# EAGLE board ai_breakout_TXB0108_panel (EAGLE 7.1.0)
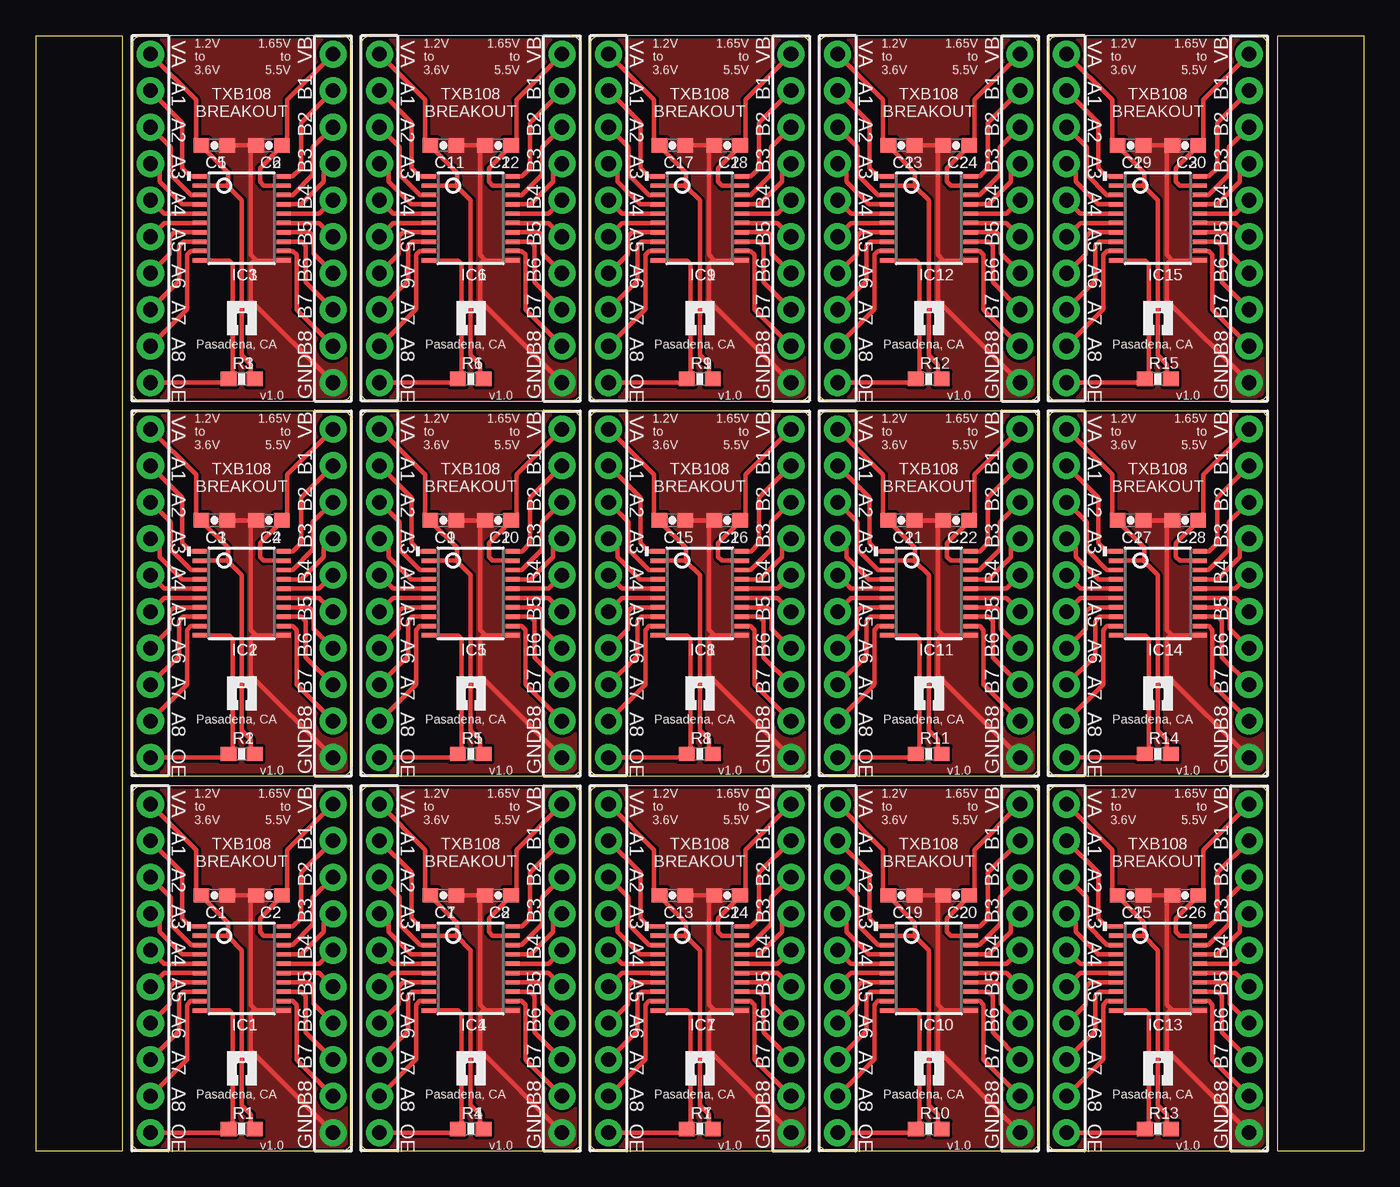
[diagram p0: board, top side]
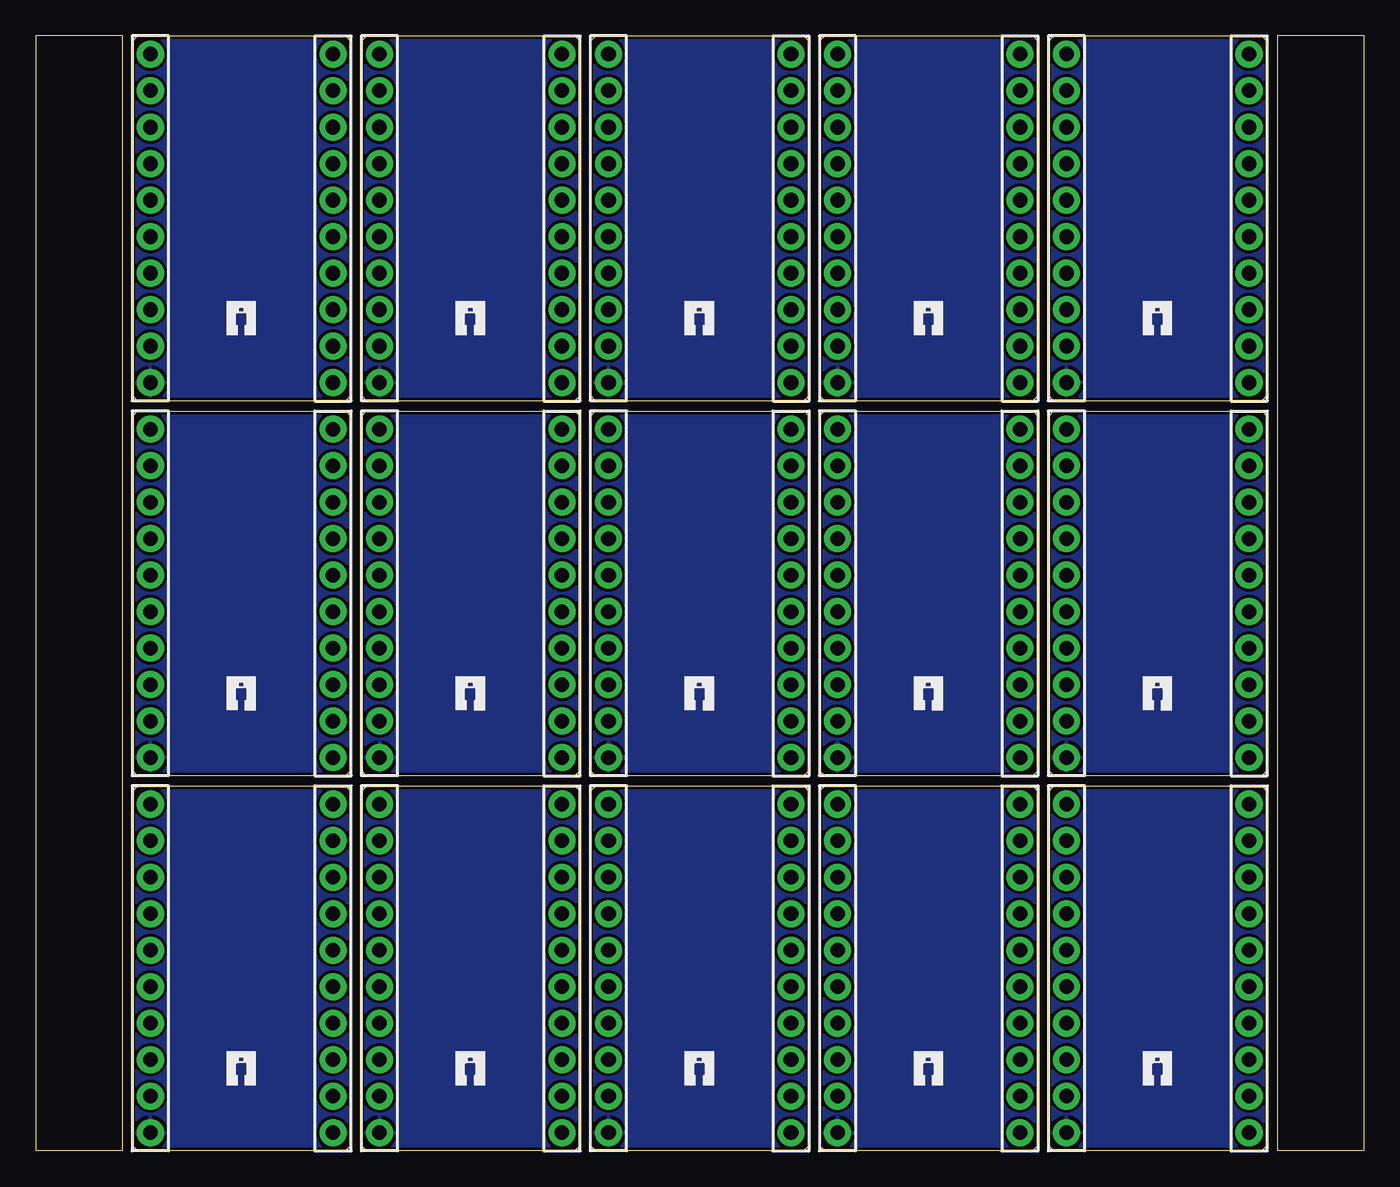
[diagram p1: board, bottom side, seen from below]

Size 92.4 x 77.6 mm. Coordinates in mm from the lower left corner, seen from the top.
Outline: 7.33,0 21.3,0 arc90 21.94,0.64 21.94,24.77 arc90 21.3,25.4 7.33,25.4 arc90 6.7,24.77 6.7,0.64 arc90 7.33,0
Outline: 7.33,26.1 21.3,26.1 arc90 21.94,26.73 21.94,50.87 arc90 21.3,51.5 7.33,51.5 arc90 6.7,50.87 6.7,26.73 arc90 7.33,26.1
Outline: 7.33,52.2 21.3,52.2 arc90 21.94,52.84 21.94,76.97 arc90 21.3,77.6 7.33,77.6 arc90 6.7,76.97 6.7,52.84 arc90 7.33,52.2
Outline: 23.27,0 37.24,0 arc90 37.88,0.64 37.88,24.77 arc90 37.24,25.4 23.27,25.4 arc90 22.64,24.77 22.64,0.64 arc90 23.27,0
Outline: 23.27,26.1 37.24,26.1 arc90 37.88,26.73 37.88,50.87 arc90 37.24,51.5 23.27,51.5 arc90 22.64,50.87 22.64,26.73 arc90 23.27,26.1
Outline: 23.27,52.2 37.24,52.2 arc90 37.88,52.84 37.88,76.97 arc90 37.24,77.6 23.27,77.6 arc90 22.64,76.97 22.64,52.84 arc90 23.27,52.2
Outline: 39.22,0 53.19,0 arc90 53.82,0.64 53.82,24.77 arc90 53.19,25.4 39.22,25.4 arc90 38.58,24.77 38.58,0.64 arc90 39.22,0
Outline: 39.22,26.1 53.19,26.1 arc90 53.82,26.73 53.82,50.87 arc90 53.19,51.5 39.22,51.5 arc90 38.58,50.87 38.58,26.73 arc90 39.22,26.1
Outline: 39.22,52.2 53.19,52.2 arc90 53.82,52.84 53.82,76.97 arc90 53.19,77.6 39.22,77.6 arc90 38.58,76.97 38.58,52.84 arc90 39.22,52.2
Outline: 55.16,0 69.12,0 arc90 69.76,0.64 69.76,24.77 arc90 69.12,25.4 55.16,25.4 arc90 54.52,24.77 54.52,0.64 arc90 55.16,0
Outline: 55.16,26.1 69.12,26.1 arc90 69.76,26.73 69.76,50.87 arc90 69.12,51.5 55.16,51.5 arc90 54.52,50.87 54.52,26.73 arc90 55.16,26.1
Outline: 55.16,52.2 69.12,52.2 arc90 69.76,52.84 69.76,76.97 arc90 69.12,77.6 55.16,77.6 arc90 54.52,76.97 54.52,52.84 arc90 55.16,52.2
Outline: 71.09,0 85.06,0 arc90 85.7,0.64 85.7,24.77 arc90 85.06,25.4 71.09,25.4 arc90 70.46,24.77 70.46,0.64 arc90 71.09,0
Outline: 71.09,26.1 85.06,26.1 arc90 85.7,26.73 85.7,50.87 arc90 85.06,51.5 71.09,51.5 arc90 70.46,50.87 70.46,26.73 arc90 71.09,26.1
Outline: 71.09,52.2 85.06,52.2 arc90 85.7,52.84 85.7,76.97 arc90 85.06,77.6 71.09,77.6 arc90 70.46,76.97 70.46,52.84 arc90 71.09,52.2
Outline: 0,77.6 0,0 6,0 6,77.6 0,77.6
Outline: 86.4,77.6 86.4,0 92.4,0 92.4,77.6 86.4,77.6
Copper layers (1*16): Top 0.035mm / dielectric 1.5mm / Bottom 0.035mm
Design rules "ai_2layer": minimum track width 7mil, minimum drill 15mil, track to track 8mil, track to pad 8mil, pad to pad 8mil, via to via 8mil, smd to smd 8mil, copper to edge 8mil, drill to drill 8mil, minimum pad ring 12mil, minimum via ring 10mil, stop-mask expansion 4mil, vias tented up to drill 20mil, thermal gap 10mil

## Footprints (pad centres in the part's own frame; a part is rotated, then mirrored left to right if it is on the bottom)
CAP-0603 = smd 1.1 x 1: 1 -0.9,0; 2 0.9,0
TSSOP20 = smd 0.305 x 0.991: 1 -2.925,-2.918; 2 -2.275,-2.918; 3 -1.625,-2.918; 4 -0.975,-2.918; 5 -0.325,-2.918; 6 0.325,-2.918; 7 0.975,-2.918; 8 1.625,-2.918; 9 2.275,-2.918; 10 2.925,-2.918; 11 2.925,2.918; 12 2.275,2.918; 13 1.625,2.918; 14 0.975,2.918; 15 0.325,2.918; 16 -0.325,2.918; 17 -0.975,2.918; 18 -1.625,2.918; 19 -2.275,2.918; 20 -2.925,2.918
1X10 = drill 1.016 pad 1.88: 1 -11.43,0; 2 -8.89,0; 3 -6.35,0; 4 -3.81,0; 5 -1.27,0; 6 1.27,0; 7 3.81,0; 8 6.35,0; 9 8.89,0; 10 11.43,0
1X10-NOFIRST = drill 1.016 pad 1.88: 1 -11.43,0; 2 -8.89,0; 3 -6.35,0; 4 -3.81,0; 5 -1.27,0; 6 1.27,0; 7 3.81,0; 8 6.35,0; 9 8.89,0; 10 11.43,0
RES-0603 = smd 1.1 x 1: 1 -0.9,0; 2 0.9,0

## Placement (x,y rotation side)
C1  0.1uF  [CAP-0603]  12.41,17.78 0 top
C2  0.1uF  [CAP-0603]  16.23,17.78 180 top
C3  0.1uF  [CAP-0603]  12.41,43.88 0 top
C4  0.1uF  [CAP-0603]  16.23,43.88 180 top
C5  0.1uF  [CAP-0603]  12.41,69.98 0 top
C6  0.1uF  [CAP-0603]  16.23,69.98 180 top
C7  0.1uF  [CAP-0603]  28.36,17.78 0 top
C8  0.1uF  [CAP-0603]  32.16,17.78 180 top
C9  0.1uF  [CAP-0603]  28.36,43.88 0 top
C10  0.1uF  [CAP-0603]  32.16,43.88 180 top
C11  0.1uF  [CAP-0603]  28.36,69.98 0 top
C12  0.1uF  [CAP-0603]  32.16,69.98 180 top
C13  0.1uF  [CAP-0603]  44.3,17.78 0 top
C14  0.1uF  [CAP-0603]  48.1,17.78 180 top
C15  0.1uF  [CAP-0603]  44.3,43.88 0 top
C16  0.1uF  [CAP-0603]  48.1,43.88 180 top
C17  0.1uF  [CAP-0603]  44.3,69.98 0 top
C18  0.1uF  [CAP-0603]  48.1,69.98 180 top
C19  0.1uF  [CAP-0603]  60.23,17.78 0 top
C20  0.1uF  [CAP-0603]  64.05,17.78 180 top
C21  0.1uF  [CAP-0603]  60.23,43.88 0 top
C22  0.1uF  [CAP-0603]  64.05,43.88 180 top
C23  0.1uF  [CAP-0603]  60.23,69.98 0 top
C24  0.1uF  [CAP-0603]  64.05,69.98 180 top
C25  0.1uF  [CAP-0603]  76.17,17.78 0 top
C26  0.1uF  [CAP-0603]  79.98,17.78 180 top
C27  0.1uF  [CAP-0603]  76.17,43.88 0 top
C28  0.1uF  [CAP-0603]  79.98,43.88 180 top
C29  0.1uF  [CAP-0603]  76.17,69.98 0 top
C30  0.1uF  [CAP-0603]  79.98,69.98 180 top
FRAME1  FRAME-LETTER  [CREATIVE-COMMONS]  49.62,-1.27 0 top
IC1  TXB0108  [TSSOP20]  14.32,12.7 270 top
IC2  TXB0108  [TSSOP20]  14.32,38.8 270 top
IC3  TXB0108  [TSSOP20]  14.32,64.9 270 top
IC4  TXB0108  [TSSOP20]  30.26,12.7 270 top
IC5  TXB0108  [TSSOP20]  30.26,38.8 270 top
IC6  TXB0108  [TSSOP20]  30.26,64.9 270 top
IC7  TXB0108  [TSSOP20]  46.2,12.7 270 top
IC8  TXB0108  [TSSOP20]  46.2,38.8 270 top
IC9  TXB0108  [TSSOP20]  46.2,64.9 270 top
IC10  TXB0108  [TSSOP20]  62.14,12.7 270 top
IC11  TXB0108  [TSSOP20]  62.14,38.8 270 top
IC12  TXB0108  [TSSOP20]  62.14,64.9 270 top
IC13  TXB0108  [TSSOP20]  78.08,12.7 270 top
IC14  TXB0108  [TSSOP20]  78.08,38.8 270 top
IC15  TXB0108  [TSSOP20]  78.08,64.9 270 top
J1  1X10  [1X10]  20.67,12.7 90 top
J2  1X10NOFIRST  [1X10-NOFIRST]  7.97,12.7 270 top
J3  1X10  [1X10]  20.67,38.8 90 top
J4  1X10NOFIRST  [1X10-NOFIRST]  7.97,38.8 270 top
J5  1X10  [1X10]  20.67,64.9 90 top
J6  1X10NOFIRST  [1X10-NOFIRST]  7.97,64.9 270 top
J7  1X10  [1X10]  36.61,12.7 90 top
J8  1X10NOFIRST  [1X10-NOFIRST]  23.91,12.7 270 top
J9  1X10  [1X10]  36.61,38.8 90 top
J10  1X10NOFIRST  [1X10-NOFIRST]  23.91,38.8 270 top
J11  1X10  [1X10]  36.61,64.9 90 top
J12  1X10NOFIRST  [1X10-NOFIRST]  23.91,64.9 270 top
J13  1X10  [1X10]  52.55,12.7 90 top
J14  1X10NOFIRST  [1X10-NOFIRST]  39.85,12.7 270 top
J15  1X10  [1X10]  52.55,38.8 90 top
J16  1X10NOFIRST  [1X10-NOFIRST]  39.85,38.8 270 top
J17  1X10  [1X10]  52.55,64.9 90 top
J18  1X10NOFIRST  [1X10-NOFIRST]  39.85,64.9 270 top
J19  1X10  [1X10]  68.49,12.7 90 top
J20  1X10NOFIRST  [1X10-NOFIRST]  55.79,12.7 270 top
J21  1X10  [1X10]  68.49,38.8 90 top
J22  1X10NOFIRST  [1X10-NOFIRST]  55.79,38.8 270 top
J23  1X10  [1X10]  68.49,64.9 90 top
J24  1X10NOFIRST  [1X10-NOFIRST]  55.79,64.9 270 top
J25  1X10  [1X10]  84.43,12.7 90 top
J26  1X10NOFIRST  [1X10-NOFIRST]  71.73,12.7 270 top
J27  1X10  [1X10]  84.43,38.8 90 top
J28  1X10NOFIRST  [1X10-NOFIRST]  71.73,38.8 270 top
J29  1X10  [1X10]  84.43,64.9 90 top
J30  1X10NOFIRST  [1X10-NOFIRST]  71.73,64.9 270 top
R1  10K  [RES-0603]  14.32,1.52 0 top
R2  10K  [RES-0603]  14.32,27.62 0 top
R3  10K  [RES-0603]  14.32,53.72 0 top
R4  10K  [RES-0603]  30.26,1.52 0 top
R5  10K  [RES-0603]  30.26,27.62 0 top
R6  10K  [RES-0603]  30.26,53.72 0 top
R7  10K  [RES-0603]  46.2,1.52 0 top
R8  10K  [RES-0603]  46.2,27.62 0 top
R9  10K  [RES-0603]  46.2,53.72 0 top
R10  10K  [RES-0603]  62.14,1.52 0 top
R11  10K  [RES-0603]  62.14,27.62 0 top
R12  10K  [RES-0603]  62.14,53.72 0 top
R13  10K  [RES-0603]  78.08,1.52 0 top
R14  10K  [RES-0603]  78.08,27.62 0 top
R15  10K  [RES-0603]  78.08,53.72 0 top
U$1  AI-LOGOXS  [AI-LOGO-XS]  13.35,4.57 0 top
U$2  AI-LOGOXS  [AI-LOGO-XS]  15.34,4.57 0 bottom
U$3  AI-LOGOXS  [AI-LOGO-XS]  13.35,30.67 0 top
U$4  AI-LOGOXS  [AI-LOGO-XS]  15.34,30.67 0 bottom
U$5  AI-LOGOXS  [AI-LOGO-XS]  13.35,56.77 0 top
U$6  AI-LOGOXS  [AI-LOGO-XS]  15.34,56.77 0 bottom
U$7  AI-LOGOXS  [AI-LOGO-XS]  29.29,4.57 0 top
U$8  AI-LOGOXS  [AI-LOGO-XS]  31.28,4.57 0 bottom
U$9  AI-LOGOXS  [AI-LOGO-XS]  29.29,30.67 0 top
U$10  AI-LOGOXS  [AI-LOGO-XS]  31.28,30.67 0 bottom
U$11  AI-LOGOXS  [AI-LOGO-XS]  29.29,56.77 0 top
U$12  AI-LOGOXS  [AI-LOGO-XS]  31.28,56.77 0 bottom
U$13  AI-LOGOXS  [AI-LOGO-XS]  45.23,4.57 0 top
U$14  AI-LOGOXS  [AI-LOGO-XS]  47.22,4.57 0 bottom
U$15  AI-LOGOXS  [AI-LOGO-XS]  45.23,30.67 0 top
U$16  AI-LOGOXS  [AI-LOGO-XS]  47.22,30.67 0 bottom
U$17  AI-LOGOXS  [AI-LOGO-XS]  45.23,56.77 0 top
U$18  AI-LOGOXS  [AI-LOGO-XS]  47.22,56.77 0 bottom
U$19  AI-LOGOXS  [AI-LOGO-XS]  61.17,4.57 0 top
U$20  AI-LOGOXS  [AI-LOGO-XS]  63.16,4.57 0 bottom
U$21  AI-LOGOXS  [AI-LOGO-XS]  61.17,30.67 0 top
U$22  AI-LOGOXS  [AI-LOGO-XS]  63.16,30.67 0 bottom
U$23  AI-LOGOXS  [AI-LOGO-XS]  61.17,56.77 0 top
U$24  AI-LOGOXS  [AI-LOGO-XS]  63.16,56.77 0 bottom
U$25  AI-LOGOXS  [AI-LOGO-XS]  77.11,4.57 0 top
U$26  AI-LOGOXS  [AI-LOGO-XS]  79.1,4.57 0 bottom
U$27  AI-LOGOXS  [AI-LOGO-XS]  77.11,30.67 0 top
U$28  AI-LOGOXS  [AI-LOGO-XS]  79.1,30.67 0 bottom
U$29  AI-LOGOXS  [AI-LOGO-XS]  77.11,56.77 0 top
U$30  AI-LOGOXS  [AI-LOGO-XS]  79.1,56.77 0 bottom

## Library data of the parts
C1-C30 R1-R15 = Ai_Passives
FRAME1 = Ai_Miscellany; REV: 1.0
IC1-IC15 = Ai_IC
J1-J30 = Ai_Connectors
U$1-U$30 = Ai_Miscellany

## Nets
A1: IC1.1 J2.2
A2: IC1.3 J2.3
A3: IC1.4 J2.4
A4: IC1.5 J2.5
A5: IC1.6 J2.6
A6: IC1.7 J2.7
A7: IC1.8 J2.8
A8: IC1.9 J2.9
A9: IC2.1 J4.2
A10: IC2.3 J4.3
A11: IC2.4 J4.4
A12: IC2.5 J4.5
A13: IC2.6 J4.6
A14: IC2.7 J4.7
A15: IC2.8 J4.8
A16: IC2.9 J4.9
A17: IC3.1 J6.2
A18: IC3.3 J6.3
A19: IC3.4 J6.4
A20: IC3.5 J6.5
A21: IC3.6 J6.6
A22: IC3.7 J6.7
A23: IC3.8 J6.8
A24: IC3.9 J6.9
A25: IC4.1 J8.2
A26: IC4.3 J8.3
A27: IC4.4 J8.4
A28: IC4.5 J8.5
A29: IC4.6 J8.6
A30: IC4.7 J8.7
A31: IC4.8 J8.8
A32: IC4.9 J8.9
A33: IC5.1 J10.2
A34: IC5.3 J10.3
A35: IC5.4 J10.4
A36: IC5.5 J10.5
A37: IC5.6 J10.6
A38: IC5.7 J10.7
A39: IC5.8 J10.8
A40: IC5.9 J10.9
A41: IC6.1 J12.2
A42: IC6.3 J12.3
A43: IC6.4 J12.4
A44: IC6.5 J12.5
A45: IC6.6 J12.6
A46: IC6.7 J12.7
A47: IC6.8 J12.8
A48: IC6.9 J12.9
A49: IC7.1 J14.2
A50: IC7.3 J14.3
A51: IC7.4 J14.4
A52: IC7.5 J14.5
A53: IC7.6 J14.6
A54: IC7.7 J14.7
A55: IC7.8 J14.8
A56: IC7.9 J14.9
A57: IC8.1 J16.2
A58: IC8.3 J16.3
A59: IC8.4 J16.4
A60: IC8.5 J16.5
A61: IC8.6 J16.6
A62: IC8.7 J16.7
A63: IC8.8 J16.8
A64: IC8.9 J16.9
A65: IC9.1 J18.2
A66: IC9.3 J18.3
A67: IC9.4 J18.4
A68: IC9.5 J18.5
A69: IC9.6 J18.6
A70: IC9.7 J18.7
A71: IC9.8 J18.8
A72: IC9.9 J18.9
A73: IC10.1 J20.2
A74: IC10.3 J20.3
A75: IC10.4 J20.4
A76: IC10.5 J20.5
A77: IC10.6 J20.6
A78: IC10.7 J20.7
A79: IC10.8 J20.8
A80: IC10.9 J20.9
A81: IC11.1 J22.2
A82: IC11.3 J22.3
A83: IC11.4 J22.4
A84: IC11.5 J22.5
A85: IC11.6 J22.6
A86: IC11.7 J22.7
A87: IC11.8 J22.8
A88: IC11.9 J22.9
A89: IC12.1 J24.2
A90: IC12.3 J24.3
A91: IC12.4 J24.4
A92: IC12.5 J24.5
A93: IC12.6 J24.6
A94: IC12.7 J24.7
A95: IC12.8 J24.8
A96: IC12.9 J24.9
A97: IC13.1 J26.2
A98: IC13.3 J26.3
A99: IC13.4 J26.4
A100: IC13.5 J26.5
A101: IC13.6 J26.6
A102: IC13.7 J26.7
A103: IC13.8 J26.8
A104: IC13.9 J26.9
A105: IC14.1 J28.2
A106: IC14.3 J28.3
A107: IC14.4 J28.4
A108: IC14.5 J28.5
A109: IC14.6 J28.6
A110: IC14.7 J28.7
A111: IC14.8 J28.8
A112: IC14.9 J28.9
A113: IC15.1 J30.2
A114: IC15.3 J30.3
A115: IC15.4 J30.4
A116: IC15.5 J30.5
A117: IC15.6 J30.6
A118: IC15.7 J30.7
A119: IC15.8 J30.8
A120: IC15.9 J30.9
B1: IC1.20 J1.9
B2: IC1.18 J1.8
B3: IC1.17 J1.7
B4: IC1.16 J1.6
B5: IC1.15 J1.5
B6: IC1.14 J1.4
B7: IC1.13 J1.3
B8: IC1.12 J1.2
B9: IC2.12 J3.2
B10: IC2.13 J3.3
B11: IC2.14 J3.4
B12: IC2.15 J3.5
B13: IC2.16 J3.6
B14: IC2.17 J3.7
B15: IC2.18 J3.8
B16: IC2.20 J3.9
B17: IC3.12 J5.2
B18: IC3.13 J5.3
B19: IC3.14 J5.4
B20: IC3.15 J5.5
B21: IC3.16 J5.6
B22: IC3.17 J5.7
B23: IC3.18 J5.8
B24: IC3.20 J5.9
B25: IC4.12 J7.2
B26: IC4.13 J7.3
B27: IC4.14 J7.4
B28: IC4.15 J7.5
B29: IC4.16 J7.6
B30: IC4.17 J7.7
B31: IC4.18 J7.8
B32: IC4.20 J7.9
B33: IC5.12 J9.2
B34: IC5.13 J9.3
B35: IC5.14 J9.4
B36: IC5.15 J9.5
B37: IC5.16 J9.6
B38: IC5.17 J9.7
B39: IC5.18 J9.8
B40: IC5.20 J9.9
B41: IC6.12 J11.2
B42: IC6.13 J11.3
B43: IC6.14 J11.4
B44: IC6.15 J11.5
B45: IC6.16 J11.6
B46: IC6.17 J11.7
B47: IC6.18 J11.8
B48: IC6.20 J11.9
B49: IC7.12 J13.2
B50: IC7.13 J13.3
B51: IC7.14 J13.4
B52: IC7.15 J13.5
B53: IC7.16 J13.6
B54: IC7.17 J13.7
B55: IC7.18 J13.8
B56: IC7.20 J13.9
B57: IC8.12 J15.2
B58: IC8.13 J15.3
B59: IC8.14 J15.4
B60: IC8.15 J15.5
B61: IC8.16 J15.6
B62: IC8.17 J15.7
B63: IC8.18 J15.8
B64: IC8.20 J15.9
B65: IC9.12 J17.2
B66: IC9.13 J17.3
B67: IC9.14 J17.4
B68: IC9.15 J17.5
B69: IC9.16 J17.6
B70: IC9.17 J17.7
B71: IC9.18 J17.8
B72: IC9.20 J17.9
B73: IC10.12 J19.2
B74: IC10.13 J19.3
B75: IC10.14 J19.4
B76: IC10.15 J19.5
B77: IC10.16 J19.6
B78: IC10.17 J19.7
B79: IC10.18 J19.8
B80: IC10.20 J19.9
B81: IC11.12 J21.2
B82: IC11.13 J21.3
B83: IC11.14 J21.4
B84: IC11.15 J21.5
B85: IC11.16 J21.6
B86: IC11.17 J21.7
B87: IC11.18 J21.8
B88: IC11.20 J21.9
B89: IC12.12 J23.2
B90: IC12.13 J23.3
B91: IC12.14 J23.4
B92: IC12.15 J23.5
B93: IC12.16 J23.6
B94: IC12.17 J23.7
B95: IC12.18 J23.8
B96: IC12.20 J23.9
B97: IC13.12 J25.2
B98: IC13.13 J25.3
B99: IC13.14 J25.4
B100: IC13.15 J25.5
B101: IC13.16 J25.6
B102: IC13.17 J25.7
B103: IC13.18 J25.8
B104: IC13.20 J25.9
B105: IC14.12 J27.2
B106: IC14.13 J27.3
B107: IC14.14 J27.4
B108: IC14.15 J27.5
B109: IC14.16 J27.6
B110: IC14.17 J27.7
B111: IC14.18 J27.8
B112: IC14.20 J27.9
B113: IC15.12 J29.2
B114: IC15.13 J29.3
B115: IC15.14 J29.4
B116: IC15.15 J29.5
B117: IC15.16 J29.6
B118: IC15.17 J29.7
B119: IC15.18 J29.8
B120: IC15.20 J29.9
GND: C1.2 C2.2 IC1.11 J1.1
GND1: C3.2 C4.2 IC2.11 J3.1
GND2: C5.2 C6.2 IC3.11 J5.1
GND3: C7.2 C8.2 IC4.11 J7.1
GND4: C9.2 C10.2 IC5.11 J9.1
GND5: C11.2 C12.2 IC6.11 J11.1
GND6: C13.2 C14.2 IC7.11 J13.1
GND7: C15.2 C16.2 IC8.11 J15.1
GND8: C17.2 C18.2 IC9.11 J17.1
GND9: C19.2 C20.2 IC10.11 J19.1
GND10: C21.2 C22.2 IC11.11 J21.1
GND11: C23.2 C24.2 IC12.11 J23.1
GND12: C25.2 C26.2 IC13.11 J25.1
GND13: C27.2 C28.2 IC14.11 J27.1
GND14: C29.2 C30.2 IC15.11 J29.1
OE: IC1.10 J2.10 R1.1
OE1: IC2.10 J4.10 R2.1
OE2: IC3.10 J6.10 R3.1
OE3: IC4.10 J8.10 R4.1
OE4: IC5.10 J10.10 R5.1
OE5: IC6.10 J12.10 R6.1
OE6: IC7.10 J14.10 R7.1
OE7: IC8.10 J16.10 R8.1
OE8: IC9.10 J18.10 R9.1
OE9: IC10.10 J20.10 R10.1
OE10: IC11.10 J22.10 R11.1
OE11: IC12.10 J24.10 R12.1
OE12: IC13.10 J26.10 R13.1
OE13: IC14.10 J28.10 R14.1
OE14: IC15.10 J30.10 R15.1
VCC-A: C1.1 IC1.2 J2.1 R1.2
VCC-A1: C3.1 IC2.2 J4.1 R2.2
VCC-A2: C5.1 IC3.2 J6.1 R3.2
VCC-A3: C7.1 IC4.2 J8.1 R4.2
VCC-A4: C9.1 IC5.2 J10.1 R5.2
VCC-A5: C11.1 IC6.2 J12.1 R6.2
VCC-A6: C13.1 IC7.2 J14.1 R7.2
VCC-A7: C15.1 IC8.2 J16.1 R8.2
VCC-A8: C17.1 IC9.2 J18.1 R9.2
VCC-A9: C19.1 IC10.2 J20.1 R10.2
VCC-A10: C21.1 IC11.2 J22.1 R11.2
VCC-A11: C23.1 IC12.2 J24.1 R12.2
VCC-A12: C25.1 IC13.2 J26.1 R13.2
VCC-A13: C27.1 IC14.2 J28.1 R14.2
VCC-A14: C29.1 IC15.2 J30.1 R15.2
VCC-B: C2.1 IC1.19 J1.10
VCC-B1: C4.1 IC2.19 J3.10
VCC-B2: C6.1 IC3.19 J5.10
VCC-B3: C8.1 IC4.19 J7.10
VCC-B4: C10.1 IC5.19 J9.10
VCC-B5: C12.1 IC6.19 J11.10
VCC-B6: C14.1 IC7.19 J13.10
VCC-B7: C16.1 IC8.19 J15.10
VCC-B8: C18.1 IC9.19 J17.10
VCC-B9: C20.1 IC10.19 J19.10
VCC-B10: C22.1 IC11.19 J21.10
VCC-B11: C24.1 IC12.19 J23.10
VCC-B12: C26.1 IC13.19 J25.10
VCC-B13: C28.1 IC14.19 J27.10
VCC-B14: C30.1 IC15.19 J29.10

## Tracks (layer width: path | path; a pad name or v marks a point on that pad's centre or on a via)
A1
  Top 0.305: IC1.1 10.76,15.62 10.19,16.19 10.19,19.37 J2.2
A2
  Top 0.305: IC1.3 10.79,14.32 9.37,15.75 9.37,17.65 J2.3
A3
  Top 0.305: IC1.4 10.17,13.68 8.61,15.24 8.61,15.88 J2.4
A4
  Top 0.305: IC1.5 8.91,13.03 J2.5
A5
  Top 0.305: IC1.6 8.91,12.38 J2.6
A6
  Top 0.305: IC1.7 9.61,11.72 9.32,11.43 9.32,10.21 8,8.89 J2.7
A7
  Top 0.305: IC1.8 10.26,11.07 9.98,10.79 9.98,8.36 J2.8
A8
  Top 0.305: IC1.9 10.78,10.43 10.54,10.16 10.54,6.38 J2.9
A9
  Top 0.305: IC2.1 10.76,41.73 10.19,42.29 10.19,45.47 J4.2
A10
  Top 0.305: IC2.3 10.79,40.42 9.37,41.85 9.37,43.75 J4.3
A11
  Top 0.305: IC2.4 10.17,39.77 8.61,41.34 8.61,41.98 J4.4
A12
  Top 0.305: IC2.5 8.91,39.12 J4.5
A13
  Top 0.305: IC2.6 8.91,38.48 J4.6
A14
  Top 0.305: IC2.7 9.61,37.83 9.32,37.53 9.32,36.31 8,34.99 J4.7
A15
  Top 0.305: IC2.8 10.26,37.17 9.98,36.9 9.98,34.46 J4.8
A16
  Top 0.305: IC2.9 10.78,36.52 10.54,36.26 10.54,32.48 J4.9
A17
  Top 0.305: IC3.1 10.76,67.83 10.19,68.39 10.19,71.57 J6.2
A18
  Top 0.305: IC3.3 10.79,66.53 9.37,67.95 9.37,69.85 J6.3
A19
  Top 0.305: IC3.4 10.17,65.88 8.61,67.44 8.61,68.08 J6.4
A20
  Top 0.305: IC3.5 8.91,65.22 J6.5
A21
  Top 0.305: IC3.6 8.91,64.58 J6.6
A22
  Top 0.305: IC3.7 9.61,63.92 9.32,63.63 9.32,62.41 8,61.09 J6.7
A23
  Top 0.305: IC3.8 10.26,63.27 9.98,62.99 9.98,60.56 J6.8
A24
  Top 0.305: IC3.9 10.78,62.62 10.54,62.36 10.54,58.58 J6.9
A25
  Top 0.305: IC4.1 26.7,15.62 26.13,16.19 26.13,19.37 J8.2
A26
  Top 0.305: IC4.3 26.73,14.32 25.31,15.75 25.31,17.65 J8.3
A27
  Top 0.305: IC4.4 26.11,13.68 24.55,15.24 24.55,15.88 J8.4
A28
  Top 0.305: IC4.5 24.86,13.03 J8.5
A29
  Top 0.305: IC4.6 24.86,12.38 J8.6
A30
  Top 0.305: IC4.7 25.55,11.72 25.26,11.43 25.26,10.21 23.93,8.89 J8.7
A31
  Top 0.305: IC4.8 26.2,11.07 25.92,10.79 25.92,8.36 J8.8
A32
  Top 0.305: IC4.9 26.71,10.43 26.48,10.16 26.48,6.38 J8.9
A33
  Top 0.305: IC5.1 26.7,41.73 26.13,42.29 26.13,45.47 J10.2
A34
  Top 0.305: IC5.3 26.73,40.42 25.31,41.85 25.31,43.75 J10.3
A35
  Top 0.305: IC5.4 26.11,39.77 24.55,41.34 24.55,41.98 J10.4
A36
  Top 0.305: IC5.5 24.86,39.12 J10.5
A37
  Top 0.305: IC5.6 24.86,38.48 J10.6
A38
  Top 0.305: IC5.7 25.55,37.83 25.26,37.53 25.26,36.31 23.93,34.99 J10.7
A39
  Top 0.305: IC5.8 26.2,37.17 25.92,36.9 25.92,34.46 J10.8
A40
  Top 0.305: IC5.9 26.71,36.52 26.48,36.26 26.48,32.48 J10.9
A41
  Top 0.305: IC6.1 26.7,67.83 26.13,68.39 26.13,71.57 J12.2
A42
  Top 0.305: IC6.3 26.73,66.53 25.31,67.95 25.31,69.85 J12.3
A43
  Top 0.305: IC6.4 26.11,65.88 24.55,67.44 24.55,68.08 J12.4
A44
  Top 0.305: IC6.5 24.86,65.22 J12.5
A45
  Top 0.305: IC6.6 24.86,64.58 J12.6
A46
  Top 0.305: IC6.7 25.55,63.92 25.26,63.63 25.26,62.41 23.93,61.09 J12.7
A47
  Top 0.305: IC6.8 26.2,63.27 25.92,62.99 25.92,60.56 J12.8
A48
  Top 0.305: IC6.9 26.71,62.62 26.48,62.36 26.48,58.58 J12.9
A49
  Top 0.305: IC7.1 42.64,15.62 42.07,16.19 42.07,19.37 J14.2
A50
  Top 0.305: IC7.3 42.67,14.32 41.25,15.75 41.25,17.65 J14.3
A51
  Top 0.305: IC7.4 42.05,13.68 40.48,15.24 40.48,15.88 J14.4
A52
  Top 0.305: IC7.5 40.8,13.03 J14.5
A53
  Top 0.305: IC7.6 40.8,12.38 J14.6
A54
  Top 0.305: IC7.7 41.49,11.72 41.2,11.43 41.2,10.21 39.88,8.89 J14.7
A55
  Top 0.305: IC7.8 42.14,11.07 41.86,10.79 41.86,8.36 J14.8
A56
  Top 0.305: IC7.9 42.66,10.43 42.41,10.16 42.41,6.38 J14.9
A57
  Top 0.305: IC8.1 42.64,41.73 42.07,42.29 42.07,45.47 J16.2
A58
  Top 0.305: IC8.3 42.67,40.42 41.25,41.85 41.25,43.75 J16.3
A59
  Top 0.305: IC8.4 42.05,39.77 40.48,41.34 40.48,41.98 J16.4
A60
  Top 0.305: IC8.5 40.8,39.12 J16.5
A61
  Top 0.305: IC8.6 40.8,38.48 J16.6
A62
  Top 0.305: IC8.7 41.49,37.83 41.2,37.53 41.2,36.31 39.88,34.99 J16.7
A63
  Top 0.305: IC8.8 42.14,37.17 41.86,36.9 41.86,34.46 J16.8
A64
  Top 0.305: IC8.9 42.66,36.52 42.41,36.26 42.41,32.48 J16.9
A65
  Top 0.305: IC9.1 42.64,67.83 42.07,68.39 42.07,71.57 J18.2
A66
  Top 0.305: IC9.3 42.67,66.53 41.25,67.95 41.25,69.85 J18.3
A67
  Top 0.305: IC9.4 42.05,65.88 40.48,67.44 40.48,68.08 J18.4
A68
  Top 0.305: IC9.5 40.8,65.22 J18.5
A69
  Top 0.305: IC9.6 40.8,64.58 J18.6
A70
  Top 0.305: IC9.7 41.49,63.92 41.2,63.63 41.2,62.41 39.88,61.09 J18.7
A71
  Top 0.305: IC9.8 42.14,63.27 41.86,62.99 41.86,60.56 J18.8
A72
  Top 0.305: IC9.9 42.66,62.62 42.41,62.36 42.41,58.58 J18.9
A73
  Top 0.305: IC10.1 58.58,15.62 58.01,16.19 58.01,19.37 J20.2
A74
  Top 0.305: IC10.3 58.61,14.32 57.19,15.75 57.19,17.65 J20.3
A75
  Top 0.305: IC10.4 57.99,13.68 56.42,15.24 56.42,15.88 J20.4
A76
  Top 0.305: IC10.5 56.73,13.03 J20.5
A77
  Top 0.305: IC10.6 56.73,12.38 J20.6
A78
  Top 0.305: IC10.7 57.43,11.72 57.14,11.43 57.14,10.21 55.81,8.89 J20.7
A79
  Top 0.305: IC10.8 58.08,11.07 57.8,10.79 57.8,8.36 J20.8
A80
  Top 0.305: IC10.9 58.59,10.43 58.35,10.16 58.35,6.38 J20.9
A81
  Top 0.305: IC11.1 58.58,41.73 58.01,42.29 58.01,45.47 J22.2
A82
  Top 0.305: IC11.3 58.61,40.42 57.19,41.85 57.19,43.75 J22.3
A83
  Top 0.305: IC11.4 57.99,39.77 56.42,41.34 56.42,41.98 J22.4
A84
  Top 0.305: IC11.5 56.73,39.12 J22.5
A85
  Top 0.305: IC11.6 56.73,38.48 J22.6
A86
  Top 0.305: IC11.7 57.43,37.83 57.14,37.53 57.14,36.31 55.81,34.99 J22.7
A87
  Top 0.305: IC11.8 58.08,37.17 57.8,36.9 57.8,34.46 J22.8
A88
  Top 0.305: IC11.9 58.59,36.52 58.35,36.26 58.35,32.48 J22.9
A89
  Top 0.305: IC12.1 58.58,67.83 58.01,68.39 58.01,71.57 J24.2
A90
  Top 0.305: IC12.3 58.61,66.53 57.19,67.95 57.19,69.85 J24.3
A91
  Top 0.305: IC12.4 57.99,65.88 56.42,67.44 56.42,68.08 J24.4
A92
  Top 0.305: IC12.5 56.73,65.22 J24.5
A93
  Top 0.305: IC12.6 56.73,64.58 J24.6
A94
  Top 0.305: IC12.7 57.43,63.92 57.14,63.63 57.14,62.41 55.81,61.09 J24.7
A95
  Top 0.305: IC12.8 58.08,63.27 57.8,62.99 57.8,60.56 J24.8
A96
  Top 0.305: IC12.9 58.59,62.62 58.35,62.36 58.35,58.58 J24.9
A97
  Top 0.305: IC13.1 74.52,15.62 73.95,16.19 73.95,19.37 J26.2
A98
  Top 0.305: IC13.3 74.55,14.32 73.13,15.75 73.13,17.65 J26.3
A99
  Top 0.305: IC13.4 73.93,13.68 72.36,15.24 72.36,15.88 J26.4
A100
  Top 0.305: IC13.5 72.67,13.03 J26.5
A101
  Top 0.305: IC13.6 72.67,12.38 J26.6
A102
  Top 0.305: IC13.7 73.37,11.72 73.08,11.43 73.08,10.21 71.75,8.89 J26.7
A103
  Top 0.305: IC13.8 74.02,11.07 73.74,10.79 73.74,8.36 J26.8
A104
  Top 0.305: IC13.9 74.53,10.43 74.3,10.16 74.3,6.38 J26.9
A105
  Top 0.305: IC14.1 74.52,41.73 73.95,42.29 73.95,45.47 J28.2
A106
  Top 0.305: IC14.3 74.55,40.42 73.13,41.85 73.13,43.75 J28.3
A107
  Top 0.305: IC14.4 73.93,39.77 72.36,41.34 72.36,41.98 J28.4
A108
  Top 0.305: IC14.5 72.67,39.12 J28.5
A109
  Top 0.305: IC14.6 72.67,38.48 J28.6
A110
  Top 0.305: IC14.7 73.37,37.83 73.08,37.53 73.08,36.31 71.75,34.99 J28.7
A111
  Top 0.305: IC14.8 74.02,37.17 73.74,36.9 73.74,34.46 J28.8
A112
  Top 0.305: IC14.9 74.53,36.52 74.3,36.26 74.3,32.48 J28.9
A113
  Top 0.305: IC15.1 74.52,67.83 73.95,68.39 73.95,71.57 J30.2
A114
  Top 0.305: IC15.3 74.55,66.53 73.13,67.95 73.13,69.85 J30.3
A115
  Top 0.305: IC15.4 73.93,65.88 72.36,67.44 72.36,68.08 J30.4
A116
  Top 0.305: IC15.5 72.67,65.22 J30.5
A117
  Top 0.305: IC15.6 72.67,64.58 J30.6
A118
  Top 0.305: IC15.7 73.37,63.92 73.08,63.63 73.08,62.41 71.75,61.09 J30.7
A119
  Top 0.305: IC15.8 74.02,63.27 73.74,62.99 73.74,60.56 J30.8
A120
  Top 0.305: IC15.9 74.53,62.62 74.3,62.36 74.3,58.58 J30.9
B1
  Top 0.305: IC1.20 17.88,15.62 18.45,16.19 18.45,19.37 J1.9
B2
  Top 0.305: IC1.18 17.85,14.32 19.27,15.75 19.27,17.65 J1.8
B3
  Top 0.305: IC1.17 18.47,13.68 20.04,15.24 20.04,15.88 J1.7
B4
  Top 0.305: IC1.16 19.73,13.03 J1.6
B5
  Top 0.305: IC1.15 19.73,12.38 J1.5
B6
  Top 0.305: IC1.14 19.03,11.72 19.32,11.43 19.32,10.24 J1.4
B7
  Top 0.305: IC1.13 18.48,11.07 18.77,10.79 18.77,8.26 J1.3
B8
  Top 0.305: IC1.12 17.86,10.43 18.13,10.16 18.13,6.35 J1.2
B9
  Top 0.305: IC2.12 17.86,36.52 18.13,36.26 18.13,32.45 J3.2
B10
  Top 0.305: IC2.13 18.48,37.17 18.77,36.9 18.77,34.35 J3.3
B11
  Top 0.305: IC2.14 19.03,37.83 19.32,37.53 19.32,36.34 J3.4
B12
  Top 0.305: IC2.15 19.73,38.48 J3.5
B13
  Top 0.305: IC2.16 19.73,39.12 J3.6
B14
  Top 0.305: IC2.17 18.47,39.77 20.04,41.34 20.04,41.98 J3.7
B15
  Top 0.305: IC2.18 17.85,40.42 19.27,41.85 19.27,43.75 J3.8
B16
  Top 0.305: IC2.20 17.88,41.73 18.45,42.29 18.45,45.47 J3.9
B17
  Top 0.305: IC3.12 17.86,62.62 18.13,62.36 18.13,58.55 J5.2
B18
  Top 0.305: IC3.13 18.48,63.27 18.77,62.99 18.77,60.45 J5.3
B19
  Top 0.305: IC3.14 19.03,63.92 19.32,63.63 19.32,62.44 J5.4
B20
  Top 0.305: IC3.15 19.73,64.58 J5.5
B21
  Top 0.305: IC3.16 19.73,65.22 J5.6
B22
  Top 0.305: IC3.17 18.47,65.88 20.04,67.44 20.04,68.08 J5.7
B23
  Top 0.305: IC3.18 17.85,66.53 19.27,67.95 19.27,69.85 J5.8
B24
  Top 0.305: IC3.20 17.88,67.83 18.45,68.39 18.45,71.57 J5.9
B25
  Top 0.305: IC4.12 33.8,10.43 34.07,10.16 34.07,6.35 J7.2
B26
  Top 0.305: IC4.13 34.42,11.07 34.7,10.79 34.7,8.26 J7.3
B27
  Top 0.305: IC4.14 34.97,11.72 35.26,11.43 35.26,10.24 J7.4
B28
  Top 0.305: IC4.15 35.66,12.38 J7.5
B29
  Top 0.305: IC4.16 35.66,13.03 J7.6
B30
  Top 0.305: IC4.17 34.41,13.68 35.98,15.24 35.98,15.88 J7.7
B31
  Top 0.305: IC4.18 33.79,14.32 35.21,15.75 35.21,17.65 J7.8
B32
  Top 0.305: IC4.20 33.82,15.62 34.39,16.19 34.39,19.37 J7.9
B33
  Top 0.305: IC5.12 33.8,36.52 34.07,36.26 34.07,32.45 J9.2
B34
  Top 0.305: IC5.13 34.42,37.17 34.7,36.9 34.7,34.35 J9.3
B35
  Top 0.305: IC5.14 34.97,37.83 35.26,37.53 35.26,36.34 J9.4
B36
  Top 0.305: IC5.15 35.66,38.48 J9.5
B37
  Top 0.305: IC5.16 35.66,39.12 J9.6
B38
  Top 0.305: IC5.17 34.41,39.77 35.98,41.34 35.98,41.98 J9.7
B39
  Top 0.305: IC5.18 33.79,40.42 35.21,41.85 35.21,43.75 J9.8
B40
  Top 0.305: IC5.20 33.82,41.73 34.39,42.29 34.39,45.47 J9.9
B41
  Top 0.305: IC6.12 33.8,62.62 34.07,62.36 34.07,58.55 J11.2
B42
  Top 0.305: IC6.13 34.42,63.27 34.7,62.99 34.7,60.45 J11.3
B43
  Top 0.305: IC6.14 34.97,63.92 35.26,63.63 35.26,62.44 J11.4
B44
  Top 0.305: IC6.15 35.66,64.58 J11.5
B45
  Top 0.305: IC6.16 35.66,65.22 J11.6
B46
  Top 0.305: IC6.17 34.41,65.88 35.98,67.44 35.98,68.08 J11.7
B47
  Top 0.305: IC6.18 33.79,66.53 35.21,67.95 35.21,69.85 J11.8
B48
  Top 0.305: IC6.20 33.82,67.83 34.39,68.39 34.39,71.57 J11.9
B49
  Top 0.305: IC7.12 49.74,10.43 50.01,10.16 50.01,6.35 J13.2
B50
  Top 0.305: IC7.13 50.37,11.07 50.65,10.79 50.65,8.26 J13.3
B51
  Top 0.305: IC7.14 50.91,11.72 51.2,11.43 51.2,10.24 J13.4
B52
  Top 0.305: IC7.15 51.6,12.38 J13.5
B53
  Top 0.305: IC7.16 51.6,13.03 J13.6
B54
  Top 0.305: IC7.17 50.35,13.68 51.91,15.24 51.91,15.88 J13.7
B55
  Top 0.305: IC7.18 49.73,14.32 51.15,15.75 51.15,17.65 J13.8
B56
  Top 0.305: IC7.20 49.76,15.62 50.33,16.19 50.33,19.37 J13.9
B57
  Top 0.305: IC8.12 49.74,36.52 50.01,36.26 50.01,32.45 J15.2
B58
  Top 0.305: IC8.13 50.37,37.17 50.65,36.9 50.65,34.35 J15.3
B59
  Top 0.305: IC8.14 50.91,37.83 51.2,37.53 51.2,36.34 J15.4
B60
  Top 0.305: IC8.15 51.6,38.48 J15.5
B61
  Top 0.305: IC8.16 51.6,39.12 J15.6
B62
  Top 0.305: IC8.17 50.35,39.77 51.91,41.34 51.91,41.98 J15.7
B63
  Top 0.305: IC8.18 49.73,40.42 51.15,41.85 51.15,43.75 J15.8
B64
  Top 0.305: IC8.20 49.76,41.73 50.33,42.29 50.33,45.47 J15.9
B65
  Top 0.305: IC9.12 49.74,62.62 50.01,62.36 50.01,58.55 J17.2
B66
  Top 0.305: IC9.13 50.37,63.27 50.65,62.99 50.65,60.45 J17.3
B67
  Top 0.305: IC9.14 50.91,63.92 51.2,63.63 51.2,62.44 J17.4
B68
  Top 0.305: IC9.15 51.6,64.58 J17.5
B69
  Top 0.305: IC9.16 51.6,65.22 J17.6
B70
  Top 0.305: IC9.17 50.35,65.88 51.91,67.44 51.91,68.08 J17.7
B71
  Top 0.305: IC9.18 49.73,66.53 51.15,67.95 51.15,69.85 J17.8
B72
  Top 0.305: IC9.20 49.76,67.83 50.33,68.39 50.33,71.57 J17.9
B73
  Top 0.305: IC10.12 65.69,10.43 65.95,10.16 65.95,6.35 J19.2
B74
  Top 0.305: IC10.13 66.31,11.07 66.58,10.79 66.58,8.26 J19.3
B75
  Top 0.305: IC10.14 66.85,11.72 67.14,11.43 67.14,10.24 J19.4
B76
  Top 0.305: IC10.15 67.55,12.38 J19.5
B77
  Top 0.305: IC10.16 67.55,13.03 J19.6
B78
  Top 0.305: IC10.17 66.29,13.68 67.86,15.24 67.86,15.88 J19.7
B79
  Top 0.305: IC10.18 65.67,14.32 67.09,15.75 67.09,17.65 J19.8
B80
  Top 0.305: IC10.20 65.7,15.62 66.27,16.19 66.27,19.37 J19.9
B81
  Top 0.305: IC11.12 65.69,36.52 65.95,36.26 65.95,32.45 J21.2
B82
  Top 0.305: IC11.13 66.31,37.17 66.58,36.9 66.58,34.35 J21.3
B83
  Top 0.305: IC11.14 66.85,37.83 67.14,37.53 67.14,36.34 J21.4
B84
  Top 0.305: IC11.15 67.55,38.48 J21.5
B85
  Top 0.305: IC11.16 67.55,39.12 J21.6
B86
  Top 0.305: IC11.17 66.29,39.77 67.86,41.34 67.86,41.98 J21.7
B87
  Top 0.305: IC11.18 65.67,40.42 67.09,41.85 67.09,43.75 J21.8
B88
  Top 0.305: IC11.20 65.7,41.73 66.27,42.29 66.27,45.47 J21.9
B89
  Top 0.305: IC12.12 65.69,62.62 65.95,62.36 65.95,58.55 J23.2
B90
  Top 0.305: IC12.13 66.31,63.27 66.58,62.99 66.58,60.45 J23.3
B91
  Top 0.305: IC12.14 66.85,63.92 67.14,63.63 67.14,62.44 J23.4
B92
  Top 0.305: IC12.15 67.55,64.58 J23.5
B93
  Top 0.305: IC12.16 67.55,65.22 J23.6
B94
  Top 0.305: IC12.17 66.29,65.88 67.86,67.44 67.86,68.08 J23.7
B95
  Top 0.305: IC12.18 65.67,66.53 67.09,67.95 67.09,69.85 J23.8
B96
  Top 0.305: IC12.20 65.7,67.83 66.27,68.39 66.27,71.57 J23.9
B97
  Top 0.305: IC13.12 81.62,10.43 81.89,10.16 81.89,6.35 J25.2
B98
  Top 0.305: IC13.13 82.25,11.07 82.53,10.79 82.53,8.26 J25.3
B99
  Top 0.305: IC13.14 82.79,11.72 83.08,11.43 83.08,10.24 J25.4
B100
  Top 0.305: IC13.15 83.48,12.38 J25.5
B101
  Top 0.305: IC13.16 83.48,13.03 J25.6
B102
  Top 0.305: IC13.17 82.23,13.68 83.8,15.24 83.8,15.88 J25.7
B103
  Top 0.305: IC13.18 81.61,14.32 83.03,15.75 83.03,17.65 J25.8
B104
  Top 0.305: IC13.20 81.64,15.62 82.21,16.19 82.21,19.37 J25.9
B105
  Top 0.305: IC14.12 81.62,36.52 81.89,36.26 81.89,32.45 J27.2
B106
  Top 0.305: IC14.13 82.25,37.17 82.53,36.9 82.53,34.35 J27.3
B107
  Top 0.305: IC14.14 82.79,37.83 83.08,37.53 83.08,36.34 J27.4
B108
  Top 0.305: IC14.15 83.48,38.48 J27.5
B109
  Top 0.305: IC14.16 83.48,39.12 J27.6
B110
  Top 0.305: IC14.17 82.23,39.77 83.8,41.34 83.8,41.98 J27.7
B111
  Top 0.305: IC14.18 81.61,40.42 83.03,41.85 83.03,43.75 J27.8
B112
  Top 0.305: IC14.20 81.64,41.73 82.21,42.29 82.21,45.47 J27.9
B113
  Top 0.305: IC15.12 81.62,62.62 81.89,62.36 81.89,58.55 J29.2
B114
  Top 0.305: IC15.13 82.25,63.27 82.53,62.99 82.53,60.45 J29.3
B115
  Top 0.305: IC15.14 82.79,63.92 83.08,63.63 83.08,62.44 J29.4
B116
  Top 0.305: IC15.15 83.48,64.58 J29.5
B117
  Top 0.305: IC15.16 83.48,65.22 J29.6
B118
  Top 0.305: IC15.17 82.23,65.88 83.8,67.44 83.8,68.08 J29.7
B119
  Top 0.305: IC15.18 81.61,66.53 83.03,67.95 83.03,69.85 J29.8
B120
  Top 0.305: IC15.20 81.64,67.83 82.21,68.39 82.21,71.57 J29.9
GND
  Top 0.305: 15.34,9.78 15.21,9.78 14.96,9.53 14.96,6.99 J1.1 | IC1.11 15.34,9.78 | 15.34,9.78 14.96,10.16 14.96,17.36 C2.2 C1.2
  pour Top (no thermals): 6.7,25.4 21.94,25.4 21.94,0 6.7,0
  pour Bottom: 6.7,25.4 21.94,25.4 21.94,0 6.7,0
GND1
  Top 0.305: 15.34,35.88 15.21,35.88 14.96,35.62 14.96,33.09 J3.1 | IC2.11 15.34,35.88 | 15.34,35.88 14.96,36.26 14.96,43.46 C4.2 C3.2
  pour Top (no thermals): 6.7,51.5 21.94,51.5 21.94,26.1 6.7,26.1
  pour Bottom: 6.7,51.5 21.94,51.5 21.94,26.1 6.7,26.1
GND2
  Top 0.305: 15.34,61.98 15.21,61.98 14.96,61.73 14.96,59.19 J5.1 | IC3.11 15.34,61.98 | 15.34,61.98 14.96,62.36 14.96,69.56 C6.2 C5.2
  pour Top (no thermals): 6.7,77.6 21.94,77.6 21.94,52.2 6.7,52.2
  pour Bottom: 6.7,77.6 21.94,77.6 21.94,52.2 6.7,52.2
GND3
  Top 0.305: 31.28,9.78 31.14,9.78 30.89,9.53 30.89,6.99 J7.1 | IC4.11 31.28,9.78 | 31.28,9.78 30.89,10.16 30.89,17.36 C8.2 C7.2
  pour Top (no thermals): 22.64,25.4 37.88,25.4 37.88,0 22.64,0
  pour Bottom: 22.64,25.4 37.88,25.4 37.88,0 22.64,0
GND4
  Top 0.305: 31.28,35.88 31.14,35.88 30.89,35.62 30.89,33.09 J9.1 | IC5.11 31.28,35.88 | 31.28,35.88 30.89,36.26 30.89,43.46 C10.2 C9.2
  pour Top (no thermals): 22.64,51.5 37.88,51.5 37.88,26.1 22.64,26.1
  pour Bottom: 22.64,51.5 37.88,51.5 37.88,26.1 22.64,26.1
GND5
  Top 0.305: 31.28,61.98 31.14,61.98 30.89,61.73 30.89,59.19 J11.1 | IC6.11 31.28,61.98 | 31.28,61.98 30.89,62.36 30.89,69.56 C12.2 C11.2
  pour Top (no thermals): 22.64,77.6 37.88,77.6 37.88,52.2 22.64,52.2
  pour Bottom: 22.64,77.6 37.88,77.6 37.88,52.2 22.64,52.2
GND6
  Top 0.305: 47.22,9.78 47.09,9.78 46.84,9.53 46.84,6.99 J13.1 | IC7.11 47.22,9.78 | 47.22,9.78 46.84,10.16 46.84,17.36 C14.2 C13.2
  pour Top (no thermals): 38.58,25.4 53.82,25.4 53.82,0 38.58,0
  pour Bottom: 38.58,25.4 53.82,25.4 53.82,0 38.58,0
GND7
  Top 0.305: 47.22,35.88 47.09,35.88 46.84,35.62 46.84,33.09 J15.1 | IC8.11 47.22,35.88 | 47.22,35.88 46.84,36.26 46.84,43.46 C16.2 C15.2
  pour Top (no thermals): 38.58,51.5 53.82,51.5 53.82,26.1 38.58,26.1
  pour Bottom: 38.58,51.5 53.82,51.5 53.82,26.1 38.58,26.1
GND8
  Top 0.305: 47.22,61.98 47.09,61.98 46.84,61.73 46.84,59.19 J17.1 | IC9.11 47.22,61.98 | 47.22,61.98 46.84,62.36 46.84,69.56 C18.2 C17.2
  pour Top (no thermals): 38.58,77.6 53.82,77.6 53.82,52.2 38.58,52.2
  pour Bottom: 38.58,77.6 53.82,77.6 53.82,52.2 38.58,52.2
GND9
  Top 0.305: 63.16,9.78 63.02,9.78 62.77,9.53 62.77,6.99 J19.1 | IC10.11 63.16,9.78 | 63.16,9.78 62.77,10.16 62.77,17.36 C20.2 C19.2
  pour Top (no thermals): 54.52,25.4 69.76,25.4 69.76,0 54.52,0
  pour Bottom: 54.52,25.4 69.76,25.4 69.76,0 54.52,0
GND10
  Top 0.305: 63.16,35.88 63.02,35.88 62.77,35.62 62.77,33.09 J21.1 | IC11.11 63.16,35.88 | 63.16,35.88 62.77,36.26 62.77,43.46 C22.2 C21.2
  pour Top (no thermals): 54.52,51.5 69.76,51.5 69.76,26.1 54.52,26.1
  pour Bottom: 54.52,51.5 69.76,51.5 69.76,26.1 54.52,26.1
GND11
  Top 0.305: 63.16,61.98 63.02,61.98 62.77,61.73 62.77,59.19 J23.1 | IC12.11 63.16,61.98 | 63.16,61.98 62.77,62.36 62.77,69.56 C24.2 C23.2
  pour Top (no thermals): 54.52,77.6 69.76,77.6 69.76,52.2 54.52,52.2
  pour Bottom: 54.52,77.6 69.76,77.6 69.76,52.2 54.52,52.2
GND12
  Top 0.305: 79.1,9.78 78.97,9.78 78.72,9.53 78.72,6.99 J25.1 | IC13.11 79.1,9.78 | 79.1,9.78 78.72,10.16 78.72,17.36 C26.2 C25.2
  pour Top (no thermals): 70.46,25.4 85.7,25.4 85.7,0 70.46,0
  pour Bottom: 70.46,25.4 85.7,25.4 85.7,0 70.46,0
GND13
  Top 0.305: 79.1,35.88 78.97,35.88 78.72,35.62 78.72,33.09 J27.1 | IC14.11 79.1,35.88 | 79.1,35.88 78.72,36.26 78.72,43.46 C28.2 C27.2
  pour Top (no thermals): 70.46,51.5 85.7,51.5 85.7,26.1 70.46,26.1
  pour Bottom: 70.46,51.5 85.7,51.5 85.7,26.1 70.46,26.1
GND14
  Top 0.305: 79.1,61.98 78.97,61.98 78.72,61.73 78.72,59.19 J29.1 | IC15.11 79.1,61.98 | 79.1,61.98 78.72,62.36 78.72,69.56 C30.2 C29.2
  pour Top (no thermals): 70.46,77.6 85.7,77.6 85.7,52.2 70.46,52.2
  pour Bottom: 70.46,77.6 85.7,77.6 85.7,52.2 70.46,52.2
OE
  Top 0.305: 13.3,1.27 R1.1 | IC1.10 13.44,9.78 13.69,9.53 13.69,1.49 R1.1 | J2.10 13.17,1.27 R1.1
OE1
  Top 0.305: 13.3,27.37 R2.1 | IC2.10 13.44,35.88 13.69,35.62 13.69,27.59 R2.1 | J4.10 13.17,27.37 R2.1
OE2
  Top 0.305: 13.3,53.47 R3.1 | IC3.10 13.44,61.98 13.69,61.73 13.69,53.69 R3.1 | J6.10 13.17,53.47 R3.1
OE3
  Top 0.305: 29.24,1.27 R4.1 | IC4.10 29.38,9.78 29.62,9.53 29.62,1.49 R4.1 | J8.10 29.11,1.27 R4.1
OE4
  Top 0.305: 29.24,27.37 R5.1 | IC5.10 29.38,35.88 29.62,35.62 29.62,27.59 R5.1 | J10.10 29.11,27.37 R5.1
OE5
  Top 0.305: 29.24,53.47 R6.1 | IC6.10 29.38,61.98 29.62,61.73 29.62,53.69 R6.1 | J12.10 29.11,53.47 R6.1
OE6
  Top 0.305: 45.18,1.27 R7.1 | IC7.10 45.31,9.78 45.56,9.53 45.56,1.49 R7.1 | J14.10 45.05,1.27 R7.1
OE7
  Top 0.305: 45.18,27.37 R8.1 | IC8.10 45.31,35.88 45.56,35.62 45.56,27.59 R8.1 | J16.10 45.05,27.37 R8.1
OE8
  Top 0.305: 45.18,53.47 R9.1 | IC9.10 45.31,61.98 45.56,61.73 45.56,53.69 R9.1 | J18.10 45.05,53.47 R9.1
OE9
  Top 0.305: 61.12,1.27 R10.1 | IC10.10 61.26,9.78 61.51,9.53 61.51,1.49 R10.1 | J20.10 60.99,1.27 R10.1
OE10
  Top 0.305: 61.12,27.37 R11.1 | IC11.10 61.26,35.88 61.51,35.62 61.51,27.59 R11.1 | J22.10 60.99,27.37 R11.1
OE11
  Top 0.305: 61.12,53.47 R12.1 | IC12.10 61.26,61.98 61.51,61.73 61.51,53.69 R12.1 | J24.10 60.99,53.47 R12.1
OE12
  Top 0.305: 77.06,1.27 R13.1 | IC13.10 77.19,9.78 77.44,9.53 77.44,1.49 R13.1 | J26.10 76.93,1.27 R13.1
OE13
  Top 0.305: 77.06,27.37 R14.1 | IC14.10 77.19,35.88 77.44,35.62 77.44,27.59 R14.1 | J28.10 76.93,27.37 R14.1
OE14
  Top 0.305: 77.06,53.47 R15.1 | IC15.10 77.19,61.98 77.44,61.73 77.44,53.69 R15.1 | J30.10 76.93,53.47 R15.1
VCC-A
  Top 0.305: IC1.2 13.31,14.97 | 13.31,14.97 13.42,14.97 | 13.31,14.97 13.37,14.92 | 13.37,14.92 14.32,13.97 14.32,3.17 14.96,2.54 14.96,1.49 R1.2 | 13.37,14.92 13.37,15.88 11.56,17.68 C1.1 11.14,18.2 11.14,20.95 J2.1
VCC-A1
  Top 0.305: IC2.2 13.31,41.08 | 13.31,41.08 13.42,41.08 | 13.31,41.08 13.37,41.02 | 13.37,41.02 14.32,40.07 14.32,29.27 14.96,28.64 14.96,27.59 R2.2 | 13.37,41.02 13.37,41.98 11.56,43.78 C3.1 11.14,44.3 11.14,47.05 J4.1
VCC-A2
  Top 0.305: IC3.2 13.31,67.17 | 13.31,67.17 13.42,67.17 | 13.31,67.17 13.37,67.12 | 13.37,67.12 14.32,66.17 14.32,55.38 14.96,54.74 14.96,53.69 R3.2 | 13.37,67.12 13.37,68.08 11.56,69.88 C5.1 11.14,70.4 11.14,73.16 J6.1
VCC-A3
  Top 0.305: IC4.2 29.25,14.97 | 29.25,14.97 29.36,14.97 | 29.25,14.97 29.31,14.92 | 29.31,14.92 30.26,13.97 30.26,3.17 30.89,2.54 30.89,1.49 R4.2 | 29.31,14.92 29.31,15.88 27.5,17.68 C7.1 27.09,18.2 27.09,20.95 J8.1
VCC-A4
  Top 0.305: IC5.2 29.25,41.08 | 29.25,41.08 29.36,41.08 | 29.25,41.08 29.31,41.02 | 29.31,41.02 30.26,40.07 30.26,29.27 30.89,28.64 30.89,27.59 R5.2 | 29.31,41.02 29.31,41.98 27.5,43.78 C9.1 27.09,44.3 27.09,47.05 J10.1
VCC-A5
  Top 0.305: IC6.2 29.25,67.17 | 29.25,67.17 29.36,67.17 | 29.25,67.17 29.31,67.12 | 29.31,67.12 30.26,66.17 30.26,55.38 30.89,54.74 30.89,53.69 R6.2 | 29.31,67.12 29.31,68.08 27.5,69.88 C11.1 27.09,70.4 27.09,73.16 J12.1
VCC-A6
  Top 0.305: IC7.2 45.2,14.97 | 45.2,14.97 45.3,14.97 | 45.2,14.97 45.25,14.92 | 45.25,14.92 46.2,13.97 46.2,3.17 46.84,2.54 46.84,1.49 R7.2 | 45.25,14.92 45.25,15.88 43.45,17.68 C13.1 43.02,18.2 43.02,20.95 J14.1
VCC-A7
  Top 0.305: IC8.2 45.2,41.08 | 45.2,41.08 45.3,41.08 | 45.2,41.08 45.25,41.02 | 45.25,41.02 46.2,40.07 46.2,29.27 46.84,28.64 46.84,27.59 R8.2 | 45.25,41.02 45.25,41.98 43.45,43.78 C15.1 43.02,44.3 43.02,47.05 J16.1
VCC-A8
  Top 0.305: IC9.2 45.2,67.17 | 45.2,67.17 45.3,67.17 | 45.2,67.17 45.25,67.12 | 45.25,67.12 46.2,66.17 46.2,55.38 46.84,54.74 46.84,53.69 R9.2 | 45.25,67.12 45.25,68.08 43.45,69.88 C17.1 43.02,70.4 43.02,73.16 J18.1
VCC-A9
  Top 0.305: IC10.2 61.13,14.97 | 61.13,14.97 61.24,14.97 | 61.13,14.97 61.19,14.92 | 61.19,14.92 62.14,13.97 62.14,3.17 62.77,2.54 62.77,1.49 R10.2 | 61.19,14.92 61.19,15.88 59.38,17.68 C19.1 58.97,18.2 58.97,20.95 J20.1
VCC-A10
  Top 0.305: IC11.2 61.13,41.08 | 61.13,41.08 61.24,41.08 | 61.13,41.08 61.19,41.02 | 61.19,41.02 62.14,40.07 62.14,29.27 62.77,28.64 62.77,27.59 R11.2 | 61.19,41.02 61.19,41.98 59.38,43.78 C21.1 58.97,44.3 58.97,47.05 J22.1
VCC-A11
  Top 0.305: IC12.2 61.13,67.17 | 61.13,67.17 61.24,67.17 | 61.13,67.17 61.19,67.12 | 61.19,67.12 62.14,66.17 62.14,55.38 62.77,54.74 62.77,53.69 R12.2 | 61.19,67.12 61.19,68.08 59.38,69.88 C23.1 58.97,70.4 58.97,73.16 J24.1
VCC-A12
  Top 0.305: IC13.2 77.08,14.97 | 77.08,14.97 77.18,14.97 | 77.08,14.97 77.13,14.92 | 77.13,14.92 78.08,13.97 78.08,3.17 78.72,2.54 78.72,1.49 R13.2 | 77.13,14.92 77.13,15.88 75.33,17.68 C25.1 74.91,18.2 74.91,20.95 J26.1
VCC-A13
  Top 0.305: IC14.2 77.08,41.08 | 77.08,41.08 77.18,41.08 | 77.08,41.08 77.13,41.02 | 77.13,41.02 78.08,40.07 78.08,29.27 78.72,28.64 78.72,27.59 R14.2 | 77.13,41.02 77.13,41.98 75.33,43.78 C27.1 74.91,44.3 74.91,47.05 J28.1
VCC-A14
  Top 0.305: IC15.2 77.08,67.17 | 77.08,67.17 77.18,67.17 | 77.08,67.17 77.13,67.12 | 77.13,67.12 78.08,66.17 78.08,55.38 78.72,54.74 78.72,53.69 R15.2 | 77.13,67.12 77.13,68.08 75.33,69.88 C29.1 74.91,70.4 74.91,73.16 J30.1
VCC-B
  Top 0.305: IC1.19 15.86,14.97 15.59,15.24 15.59,16.19 17.07,17.68 C2.1 17.5,18.2 17.5,20.95 J1.10
VCC-B1
  Top 0.305: IC2.19 15.86,41.08 15.59,41.34 15.59,42.29 17.07,43.78 C4.1 17.5,44.3 17.5,47.05 J3.10
VCC-B2
  Top 0.305: IC3.19 15.86,67.17 15.59,67.44 15.59,68.39 17.07,69.88 C6.1 17.5,70.4 17.5,73.16 J5.10
VCC-B3
  Top 0.305: IC4.19 31.8,14.97 31.53,15.24 31.53,16.19 33.02,17.68 C8.1 33.44,18.2 33.44,20.95 J7.10
VCC-B4
  Top 0.305: IC5.19 31.8,41.08 31.53,41.34 31.53,42.29 33.02,43.78 C10.1 33.44,44.3 33.44,47.05 J9.10
VCC-B5
  Top 0.305: IC6.19 31.8,67.17 31.53,67.44 31.53,68.39 33.02,69.88 C12.1 33.44,70.4 33.44,73.16 J11.10
VCC-B6
  Top 0.305: IC7.19 47.73,14.97 47.47,15.24 47.47,16.19 48.95,17.68 C14.1 49.38,18.2 49.38,20.95 J13.10
VCC-B7
  Top 0.305: IC8.19 47.73,41.08 47.47,41.34 47.47,42.29 48.95,43.78 C16.1 49.38,44.3 49.38,47.05 J15.10
VCC-B8
  Top 0.305: IC9.19 47.73,67.17 47.47,67.44 47.47,68.39 48.95,69.88 C18.1 49.38,70.4 49.38,73.16 J17.10
VCC-B9
  Top 0.305: IC10.19 63.67,14.97 63.41,15.24 63.41,16.19 64.89,17.68 C20.1 65.31,18.2 65.31,20.95 J19.10
VCC-B10
  Top 0.305: IC11.19 63.67,41.08 63.41,41.34 63.41,42.29 64.89,43.78 C22.1 65.31,44.3 65.31,47.05 J21.10
VCC-B11
  Top 0.305: IC12.19 63.67,67.17 63.41,67.44 63.41,68.39 64.89,69.88 C24.1 65.31,70.4 65.31,73.16 J23.10
VCC-B12
  Top 0.305: IC13.19 79.61,14.97 79.35,15.24 79.35,16.19 80.83,17.68 C26.1 81.25,18.2 81.25,20.95 J25.10
VCC-B13
  Top 0.305: IC14.19 79.61,41.08 79.35,41.34 79.35,42.29 80.83,43.78 C28.1 81.25,44.3 81.25,47.05 J27.10
VCC-B14
  Top 0.305: IC15.19 79.61,67.17 79.35,67.44 79.35,68.39 80.83,69.88 C30.1 81.25,70.4 81.25,73.16 J29.10

## Text on the board
tPlace: VA | VA | VA | VA | VA | VB | VB | VB | VB | VB | 1.2V / to / 3.6V | 1.65V / to / 5.5V | 1.2V / to / 3.6V | 1.65V / to / 5.5V | 1.2V / to / 3.6V | 1.65V / to / 5.5V | 1.2V / to / 3.6V | 1.65V / to / 5.5V | 1.2V / to / 3.6V | 1.65V / to / 5.5V | A1 | A1 | A1 | A1 | A1 | TXB108 / BREAKOUT | B1 | TXB108 / BREAKOUT | B1 | TXB108 / BREAKOUT | B1 | TXB108 / BREAKOUT | B1 | TXB108 / BREAKOUT | B1 | A2 | A2 | A2 | A2 | A2 | B2 | B2 | B2 | B2 | B2 | A3 | A3 | A3 | A3 | A3 | B3 | B3 | B3 | B3 | B3 | A4 | A4 | A4 | A4 | A4 | B4 | B4 | B4 | B4 | B4 | A5 | A5 | A5 | A5 | A5 | B5 | B5 | B5 | B5 | B5 | A6 | A6 | A6 | A6 | A6 | B6 | B6 | B6 | B6 | B6 | A7 | A7 | A7 | A7 | A7 | B7 | B7 | B7 | B7 | B7 | A8 | A8 | A8 | A8 | A8 | Pasadena, CA | Pasadena, CA | Pasadena, CA | Pasadena, CA | Pasadena, CA | B8 | B8 | B8 | B8 | B8 | OE | OE | OE | OE | OE | v1.0 | GND | v1.0 | GND | v1.0 | GND | v1.0 | GND | v1.0 | GND | VA | VA | VA | VA | VA | VB | VB | VB | VB | VB | 1.2V / to / 3.6V | 1.65V / to / 5.5V | 1.2V / to / 3.6V | 1.65V / to / 5.5V | 1.2V / to / 3.6V | 1.65V / to / 5.5V | 1.2V / to / 3.6V | 1.65V / to / 5.5V | 1.2V / to / 3.6V | 1.65V / to / 5.5V | A1 | A1 | A1 | A1 | A1 | TXB108 / BREAKOUT | B1 | TXB108 / BREAKOUT | B1 | TXB108 / BREAKOUT | B1 | TXB108 / BREAKOUT | B1 | TXB108 / BREAKOUT | B1 | A2 | A2 | A2 | A2 | A2 | B2 | B2 | B2 | B2 | B2 | A3 | A3 | A3 | A3 | A3 | B3 | B3 | B3 | B3 | B3 | A4 | A4 | A4 | A4 | A4 | B4 | B4 | B4 | B4 | B4 | A5 | A5 | A5 | A5 | A5 | B5 | B5 | B5 | B5 | B5 | A6 | A6 | A6 | A6 | A6 | B6 | B6 | B6 | B6 | B6 | A7 | A7 | A7 | A7 | A7 | B7 | B7 | B7 | B7 | B7 | A8 | A8 | A8 | A8 | A8 | Pasadena, CA | Pasadena, CA | Pasadena, CA | Pasadena, CA | Pasadena, CA | B8 | B8 | B8 | B8 | B8 | OE | OE | OE | OE | OE | v1.0 | GND | v1.0 | GND | v1.0 | GND | v1.0 | GND | v1.0 | GND | VA | VA | VA | VA | VA | 1.2V / to / 3.6V | 1.65V / to / 5.5V | VB | 1.2V / to / 3.6V | 1.65V / to / 5.5V | VB | 1.2V / to / 3.6V | 1.65V / to / 5.5V | VB | 1.2V / to / 3.6V | 1.65V / to / 5.5V | VB | 1.2V / to / 3.6V | 1.65V / to / 5.5V | VB | A1 | A1 | A1 | A1 | A1 | TXB108 / BREAKOUT | B1 | TXB108 / BREAKOUT | B1 | TXB108 / BREAKOUT | B1 | TXB108 / BREAKOUT | B1 | TXB108 / BREAKOUT | B1 | A2 | A2 | A2 | A2 | A2 | B2 | B2 | B2 | B2 | B2 | A3 | A3 | A3 | A3 | A3 | B3 | B3 | B3 | B3 | B3 | A4 | A4 | A4 | A4 | A4 | B4 | B4 | B4 | B4 | B4 | A5 | A5 | A5 | A5 | A5 | B5 | B5 | B5 | B5 | B5 | A6 | A6 | A6 | A6 | A6 | B6 | B6 | B6 | B6 | B6 | A7 | A7 | A7 | A7 | A7 | B7 | B7 | B7 | B7 | B7 | A8 | Pasadena, CA | A8 | Pasadena, CA | A8 | Pasadena, CA | A8 | Pasadena, CA | A8 | Pasadena, CA | B8 | B8 | B8 | B8 | B8 | OE | OE | OE | OE | OE | v1.0 | GND | v1.0 | GND | v1.0 | GND | v1.0 | GND | v1.0 | GND
tDocu: @MakerBro
_tNames: C1 | C2 | C1 | C2 | C1 | C2 | C1 | C2 | C1 | C2 | IC1 | IC1 | IC1 | IC1 | IC1 | R1 | R1 | R1 | R1 | R1 | C1 | C2 | C1 | C2 | C1 | C2 | C1 | C2 | C1 | C2 | IC1 | IC1 | IC1 | IC1 | IC1 | R1 | R1 | R1 | R1 | R1 | C1 | C2 | C1 | C2 | C1 | C2 | C1 | C2 | C1 | C2 | IC1 | IC1 | IC1 | IC1 | IC1 | R1 | R1 | R1 | R1 | R1